# Altium PCB PCB1.pcbdoc
Units mil, origin at the board's own origin, x right, y up, seen from the top; angles counter-clockwise.
Board outline 2930 x 2180 mil, 2 copper layers (Top Layer, Bottom Layer); 24 components, 14 nets, 77 pads, 0 vias.
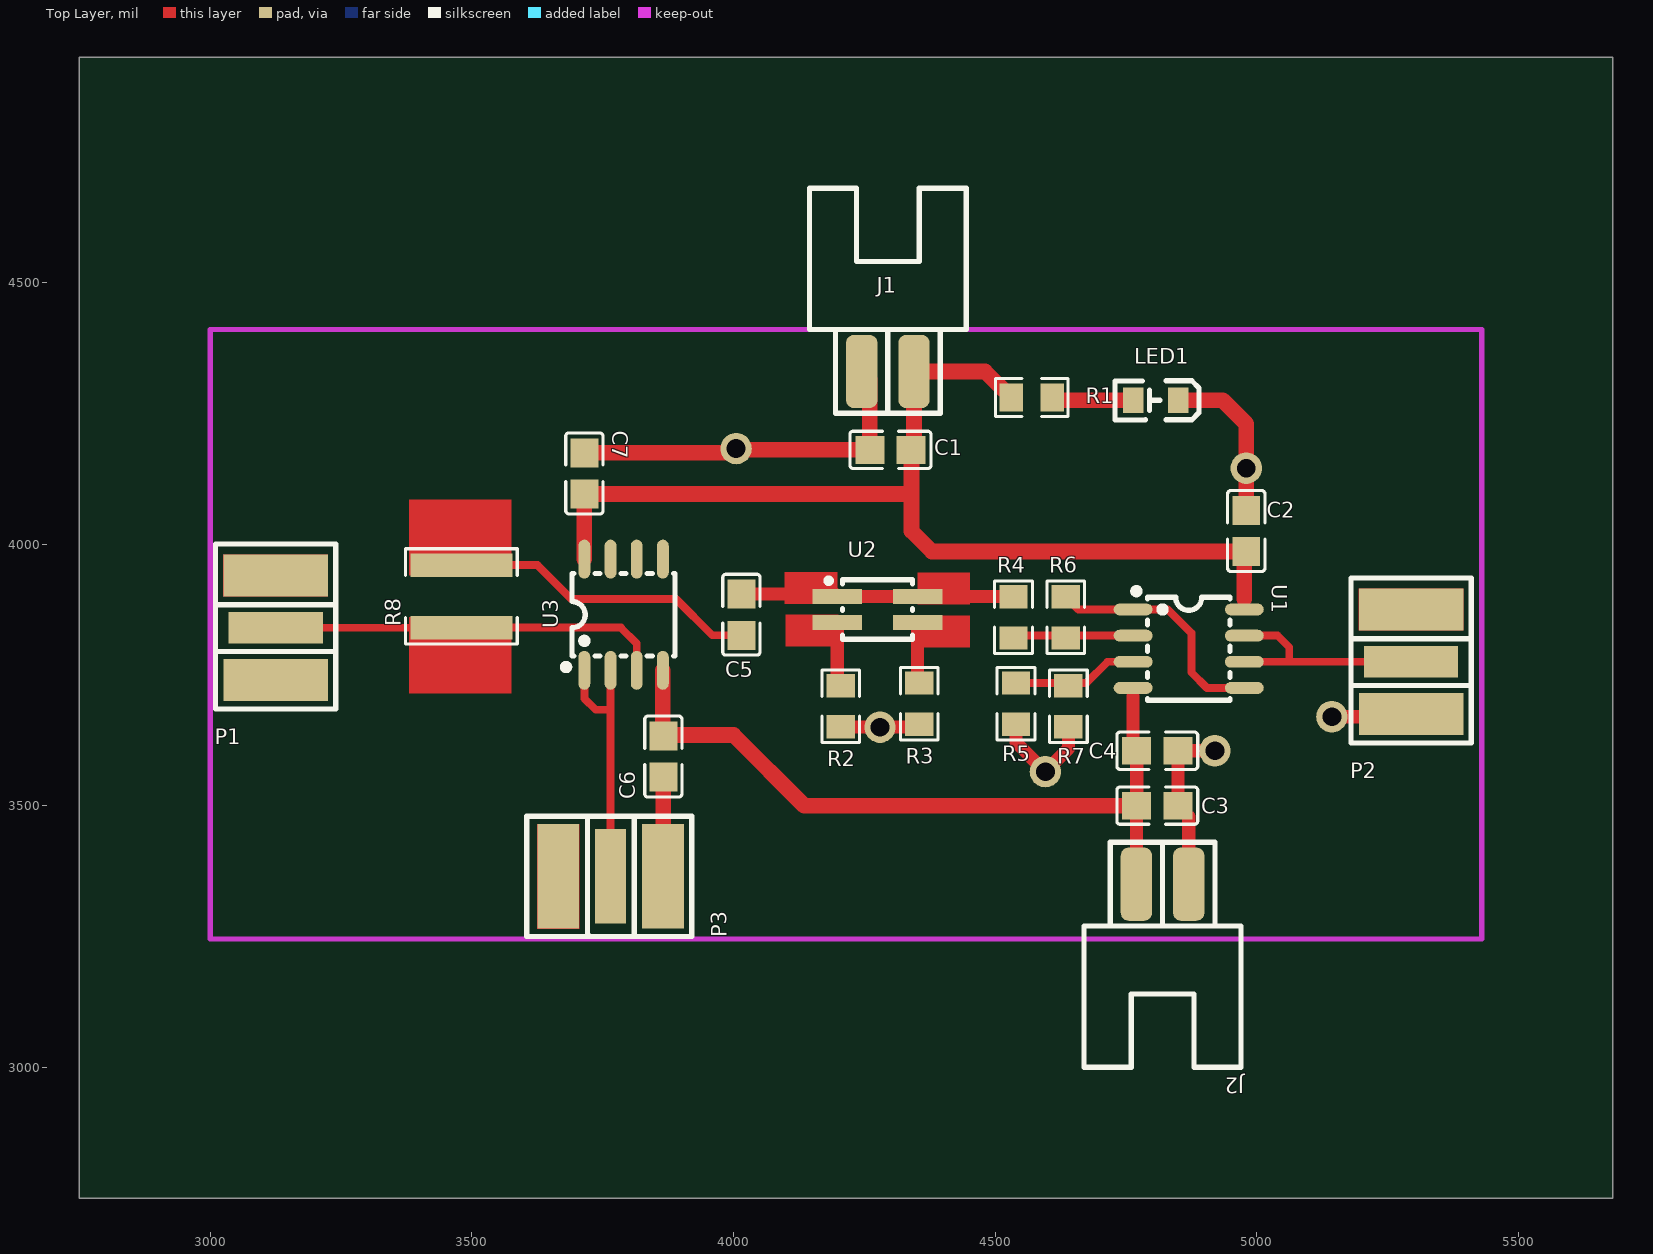
[diagram p0: Top Layer view]
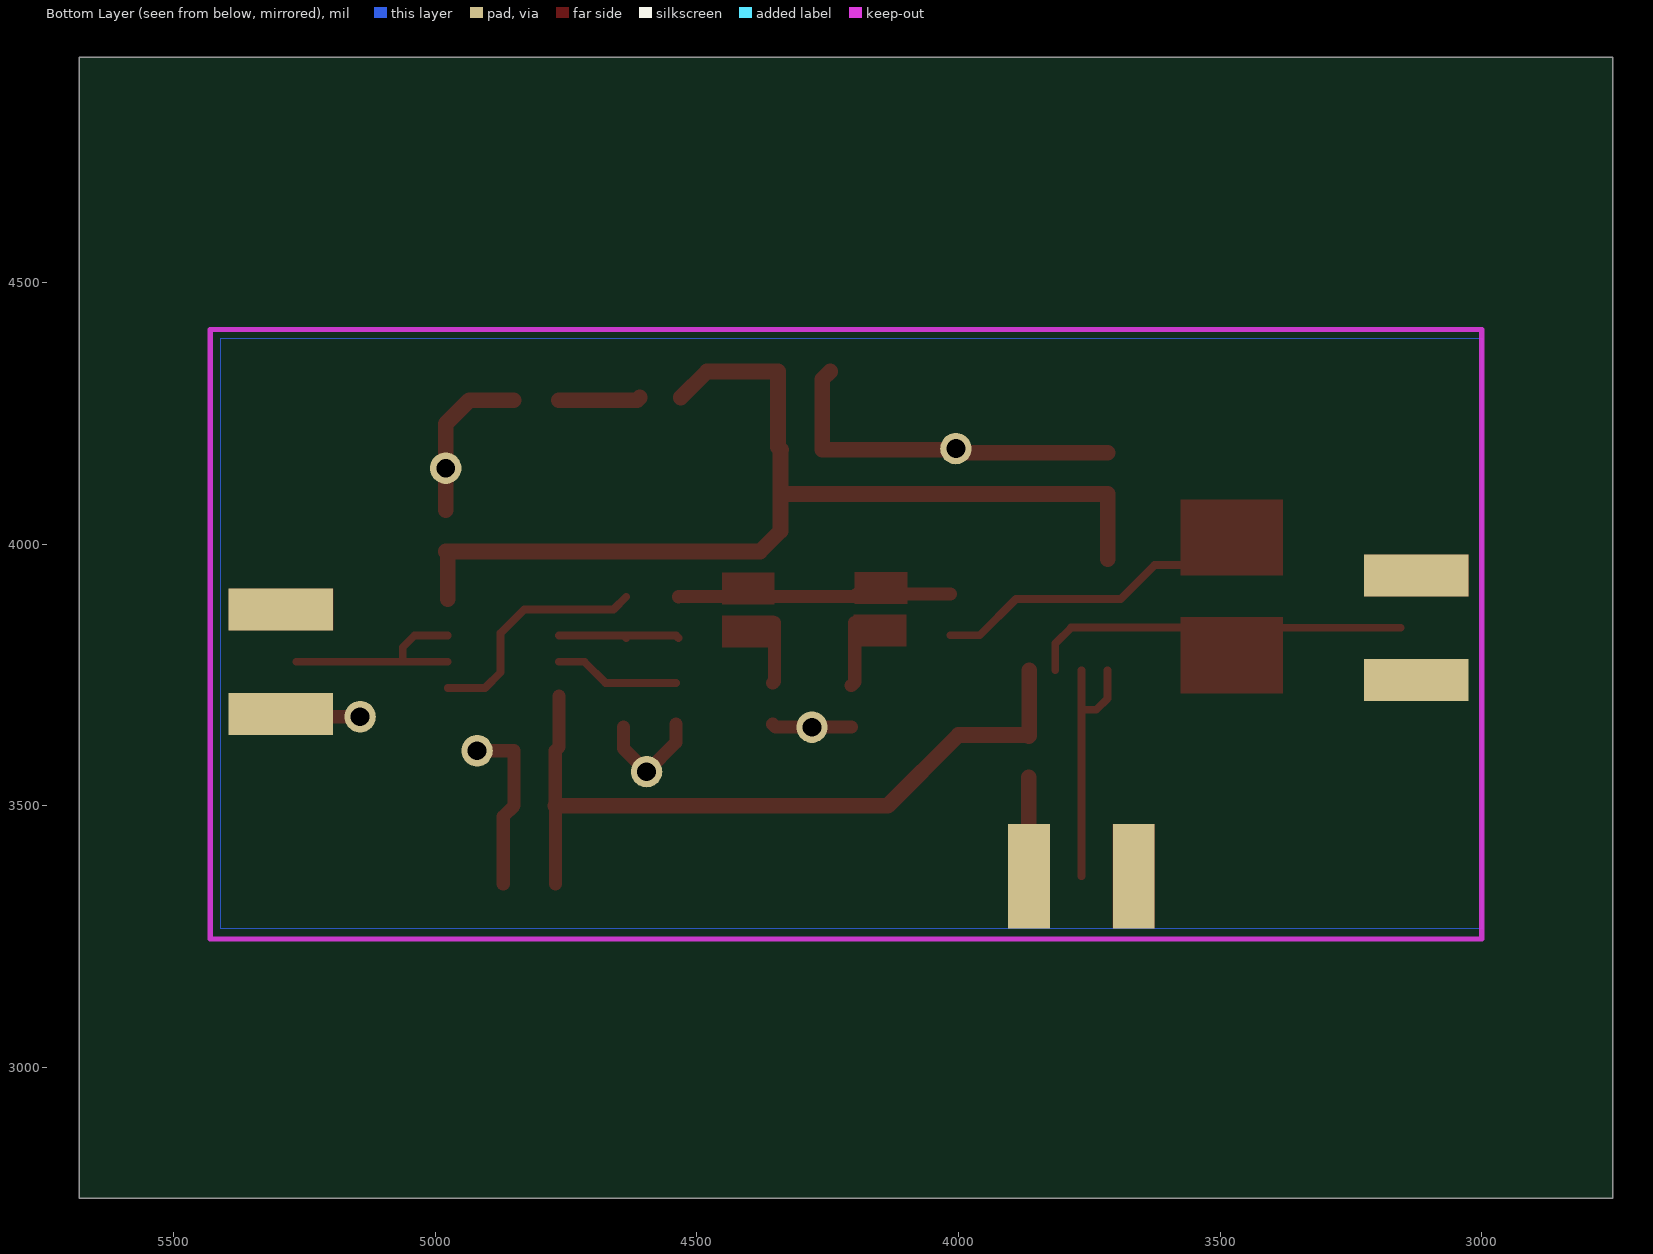
[diagram p1: Bottom Layer view, seen from below]

## Layer stack, top to bottom
Top Layer: signal copper (thickness not stored)
Dielectric: dielectric 12.6, FR-4, Dk 4.8
Bottom Layer: signal copper (thickness not stored)

## Board outline
5680,2750 2750,2750 2750,4930 5680,4930

## Components (designator, comment, footprint, x,y, rotation, side; value= is the part's Value field where it differs from the comment)
C1 "CAP_0805" C0805 4300,4180 r180 top
C2 "CAP_0805" C0805 4980,4025 r90 top
C3 "CAP_0805" C0805 4810,3500 r180 top
C4 "CAP_0805" C0805 4810,3605 r180 top
C5 "CAP_0805" C0805 4015,3865 r90 top
C6 "CAP_0805" C0805 3865.94,3593.95 r90 top
C7 "CAP_0805" C0805 3715,4135 r270 top
J1 "CON2" sip2e 4345,4330 r0 top
J2 "CON2" sip2e 4770,3350 r180 top
LED1 "LED_0805-R" LED_0805 4805,4275 r180 top
P1 "BNC" SMA-E 3125,3840 r0 top
P2 "BNC" SMA-E 5295,3775 r0 top
P3 "BNC" SMA-E 3765,3365 r90 top
R1 "Res_0805" R0805 4570,4280 r0 top
R2 "Res_0805" R0805 4205,3690 r90 top
R3 "Res_0805" R0805 4355,3695 r90 top
R4 "Res_0805" R0805 4535,3860 r270 top
R5 "Res_0805" R0805 4540,3695 r90 top
R6 "Res_0805" R0805 4635,3860 r90 top
R7 "Res_0805" R0805 4640,3690 r270 top
R8 "Res_1218" R1218 3480,3900 r90 top
U1 "LT1361CS8#PBF" SO-8_L4.9-W3.9-P1.27-LS5.9-BL 4870,3800 r270 top
U2 "PZ127-2-02-S" HDR-SMD_4P-P1.27-V-M-R2-C2-LS5.3 4275,3875 r270 top
U3 "LT1361CS8#PBF" SO-8_L4.9-W3.9-P1.27-LS5.9-BL 3790,3865 r0 top

## Footprints (in the part's own frame and the unit in brackets; to place one, negate y for a bottom-side part, rotate by r counter-clockwise, add the part's x,y. Pads: shape width x height; smd on the part's side, far side on the other; paste and mask are expansions set on the pad)
C0805 [mm]
  rect 1.41x1.35 smd: 1(-1,0) 2(1,0)
  silkscreen extent -1.96,-0.9 1.96,0.9
HDR-SMD_4P-P1.27-V-M-R2-C2-LS5.3 [mm]
  rect 0.74x2.4 smd: 1(-0.635,-1.95) 2(-0.635,1.95) 3(0.635,-1.95) 4(0.635,1.95)
  silkscreen extent -1.52,-2.49 1.45,1.7
LED_0805 [mm]
  rect 1x1.25 smd: 1(-1.15,0.005) 2(1.05,0.005)
  silkscreen extent -2.15,-0.94 1.93,0.97
R0805 [mm]
  rect 1.133x1.377 smd: 1(-1,0) 2(1,0)
  silkscreen extent -1.76,-0.92 1.76,0.92
R1218 [mil]
  rect 44.59x195.59 smd: 1(-59.7,0) 2(59.7,0)
  silkscreen extent -91,-107 91,107
sip2e [mil]
  rrect50% 60x140 smd: 1(0,0) 2(-100,0)
  silkscreen extent -200,-80 100,350
SMA-E [mil]
  rect 180x60 smd: 1(0,0)
  rect 200x80 smd: 2(0,100) 4(0,-100)
  rect 200x80 smd far side: 3(0,100) 5(0,-100)
  Top Layer region: -100,60 100,60 100,140 -100,140
  silkscreen extent -115,-155 115,160
SO-8_L4.9-W3.9-P1.27-LS5.9-BL [mil]
  oval 22.6x74.33 smd: 1(-75,-106.26) 2(-25,-106.26) 3(25,-106.26) 4(75,-106.26) 5(75,106.26) 6(25,106.26) 7(-25,106.26) 8(-75,106.26)
  silkscreen extent -116,-106 98,79

## Free pads (board coordinates)
  round 60 hole 36: 3(4280,3650) 9(4596.1,3565) 11(4005,4182.45) 11(4920,3605) 11(4980,4145) 11(5143.59,3670)

## Nets (pads, with @x,y where several pads share a name; then routed paths per layer and width w, separated by ;. In a path a pad name is that pad's centre, name@x,y a point inside that pad or via, vN(x,y) a via of type N, cw(c..) or ccw(c..) an arc to the next point about the centre after c; other vN are vias at no path point)
$1N705: LED1.2 R1.2 | length 156.4
  Top Layer w30: R1.2 4614.57,4274.8 LED1.2
$1N1369: C5.2 R4.1 U2.1 U2.2 | length 522.1
  Top Layer w25: C5.2 4193.86,3904.37 U2.1 U2.2 4534.37,3900 R4.1
$1N1384: R2.2 U2.3 | length 123.4
  Top Layer w25: U2.3 4198.23,3736.14 R2.2
$1N1387: R3.2 U2.4 | length 117
  Top Layer w25: U2.4 4351.77,3737.6 R3.2
$1N1400: R4.2 R6.1 U1.2 | length 236.7
  Top Layer w15: R4.2 4539.37,3825 R6.1@4639.37,3825 ; R6.1 R6.1@4639.37,3825 ; U1.2 R6.1@4639.37,3825
$1N1411: R5.2 R7.1 U1.3 | length 240.6
  Top Layer w15: R5.2 4640,3734.37 4674.37,3734.37 4715,3775 U1.3
$1N1472: R6.2 U1.1 U1.5 | length 457.4
  Top Layer w15: R6.2 4659.37,3875 U1.1 4830,3875 4875,3830 4875,3755 4905,3725 U1.5
$1N1543: P2.1 U1.6 U1.7 | length 411.6
  Top Layer w15: U1.6 5062.06,3775 ; U1.7 5040,3825 5062.06,3802.94 5062.06,3775 ; P2.1@5265,3775 5062.06,3775
$1N2432: P1.1 R8.1 U3.3 | length 723.9
  Top Layer w15: P1.1@3155,3840 3479.7,3840 R8.1 3784.7,3840.3 3815,3810 U3.3
$1N2561: P3.1 U3.1 U3.2 | length 506.4
  Top Layer w15: U3.1 3715,3705 3736.63,3683.37 3765,3683.37 ; P3.1 3765,3683.37 ; U3.2 3765,3683.37
$1N2744: C5.1 R8.2 | length 590.5
  Top Layer w15: R8.2 3625.3,3959.7 3690,3895 3890,3895 3959.37,3825.63 C5.1
+5V: C1.1 C2.1 C7.2 J1.1 R1.1 U1.8 U3.8 | length 2011.8
  Top Layer w30: U3.8 C7.2 4340,4095.63 ; R1.1 4480.63,4330 J1.1 4345,4185.63 C1.1 4340,4179.37 4340,4095.63 ; 4976.26,3895 4976.26,3981.89 C2.1 4379.37,3985.63 4340,4025 4340,4095.63
-5V: C3.2 C4.2 C6.2 J2.1 U1.4 U3.4 | length 1450.2
  Top Layer w25: 4763.74,3710 4763.74,3611.89 C4.2 C3.2 4770,3499.37 J2.1
  Top Layer w30: U3.4 3865,3634.25 C6.2 3867.62,3635 4000,3635 4135,3500 C3.2
GND: C1.2 C2.2 C3.1 C4.1 C6.1 C7.1 J1.2 J2.2 LED1.1 P1.2 P1.3 P1.4 P1.5 P2.2 P2.3 P2.4 P2.5 P3.2 P3.3 P3.4 P3.5 pad.3 pad.9 pad.11 R2.1 R3.1 R5.1 R7.2 | length 2068.3
  Top Layer w25: R2.1 4279.37,3650.63 pad.3 4349.37,3650 R3.1 ; R5.1 4540,3621.1 pad.9 4640,3608.9 R7.2 ; J2.2 4870,3479.37 C3.1 C4.1 pad.11@4920,3605 ; pad.11@5143.59,3670 5290,3670 P2.4
  Top Layer w30: C7.1 3996.92,4174.37 4005,4182.45 4007.45,4180 C1.2 4260.63,4314.37 J1.2 ; P3.4 3865.94,3365.94 C6.1 ; LED1.1 4935.2,4274.8 4980,4230 4980,4150 C2.2
pads on no net: U3.5 U3.6 U3.7

## Polygon pours and split planes (outlines as drawn)
GND on Bottom Layer (hatched 45Degree grid 30 track 10, remove dead copper, pour order 0): 3000,3265 5410,3265 5410,4392.89 3000,4392.89

## Keep-outs
Board Outline Layer:
  lines w10: 3000,3245 5430,3245 5430,4410 3000,4410 3000,3245

## Other copper
Top Layer:
  region net $1N1369: 4351.77,3885 4451.77,3885 4451.77,3945 4351.77,3945
  region net $1N1369: 4098.23,3886.18 4198.23,3886.18 4198.23,3946.18 4098.23,3946.18
  region net $1N1387: 4351.77,3803.16 4451.77,3803.16 4451.77,3863.16 4351.77,3863.16
  region net $1N1384: 4100,3805 4200,3805 4200,3865 4100,3865
  region net $1N2744: 3380,3940 3575,3940 3575,4085 3380,4085
  region net $1N2432: 3380,3715 3575,3715 3575,3860 3380,3860